# EAGLE board piezo-preamp-tickler_V2-RevB (EAGLE 8.2.1)
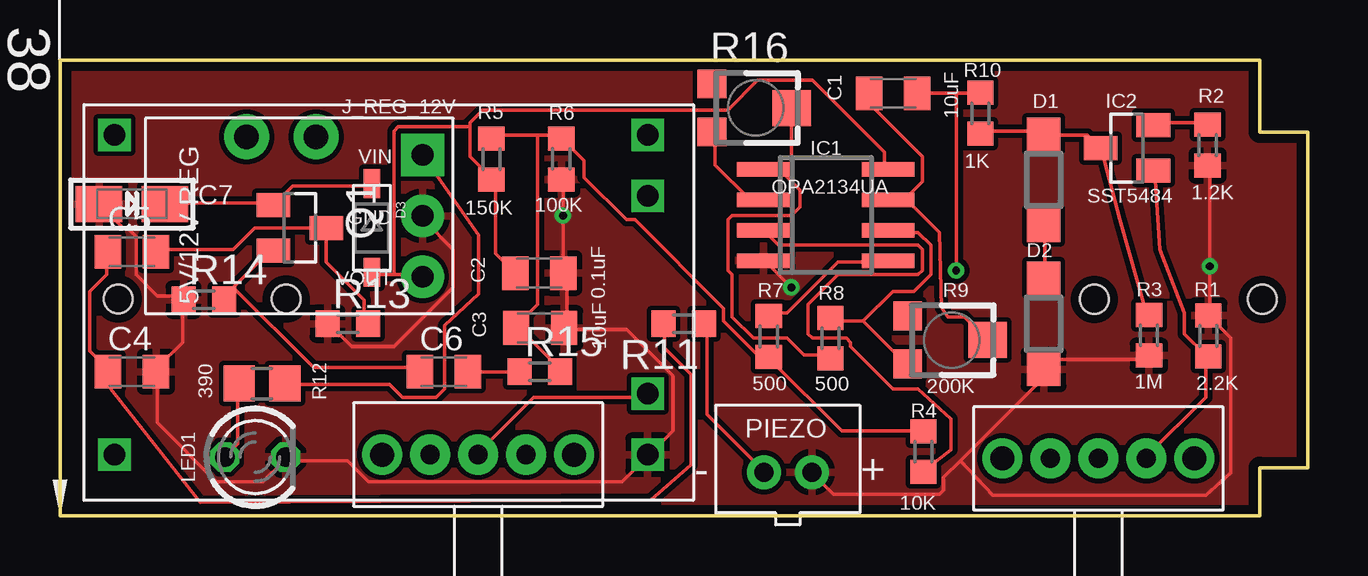
[diagram p0: board, top side]
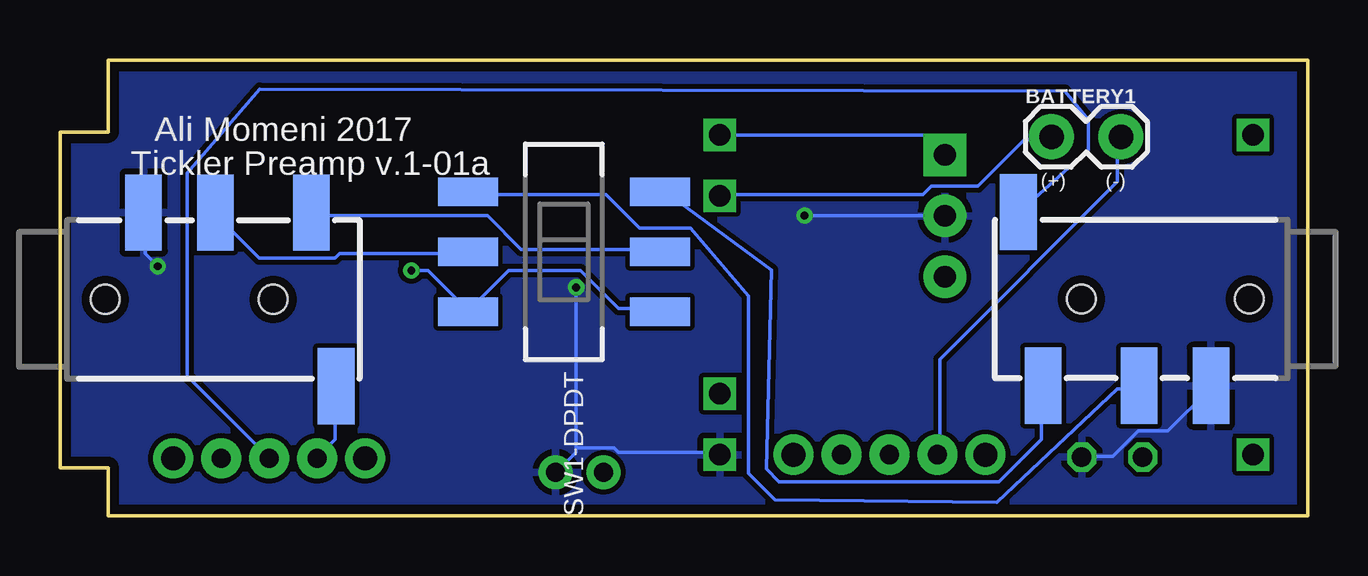
[diagram p1: board, bottom side, seen from below]

Size 52 x 19 mm. Coordinates in mm from the lower left corner, seen from the top.
Outline: 0,0 50,0 50,2 52,2 52,16 50,16 50,19 0,19 0,0
Copper layers (1*16): Top 0.0356mm / dielectric 1.5011mm / Bottom 0.0356mm
Design rules "oshpark-2layer": minimum track width 6mil, minimum drill 13mil, track to track 6mil, track to pad 6mil, pad to pad 6mil, via to via 6mil, smd to smd 6mil, copper to edge 15mil, drill to drill 6mil, minimum pad ring 7mil, minimum via ring 7mil, stop-mask expansion 2.5mil, vias tented up to drill 0mil, thermal gap 10mil
Net classes: 0 default: width 0.152 mm, clearance 0.2 mm

## Footprints (pad centres in the part's own frame; a part is rotated, then mirrored left to right if it is on the bottom)
1X02_LOCK = drill 1.016 pad 1.88: 1 -0.178,0; 2 2.718,0
C0805K = smd 1.1 x 1.4: 1 -1,0; 2 1,0
EIA3216-18/A-R = smd 1.95 x 1.5: + 1.375,0; - -1.375,0
SOD123 = smd 1.4 x 1.4: A 1.9,0; C -1.9,0
SOD-123 = smd 1.2 x 0.7: A 1.85,0; C -1.85,0
SO08 = smd 0.6 x 2.2: 1 -1.905,-2.6; 2 -0.635,-2.6; 3 0.635,-2.6; 4 1.905,-2.6; 5 1.905,2.6; 6 0.635,2.6; 7 -0.635,2.6; 8 -1.905,2.6
SOT23 = smd 1 x 1.4: 1 -0.95,-1.1; 2 0.95,-1.1; 3 0,1.1
POLOLU_5V-12V_STEPUP_U3V12F5-U3V12F12 = drill 0.9 pad 1.778: GND 0,-6.35; VOUT -2.54,-6.35 | drill 0.9 pad 1.778 square: VIN 2.54,-6.35
LED3MM = drill 0.813 octagon: A -1.27,0; K 1.27,0
JST-PH-2-THM = drill 0.8 pad 1.422: 1 1,0; 2 -1,0
SWITCH_SPDT-TE-CONNECT = drill 0.8 pad 1.676: 1 2,0; 2 4,0; 3 6,0 | drill 1 pad 1.676: MOUNT1 0,0; MOUNT2 8,0
R0603 = smd 1 x 1.1: 1 -0.85,0; 2 0.85,0
TC33X = smd 1.2 x 1.2: 1 -1,-1.825; 3 1,-1.825 | smd 1.5 x 1.6: 2 0,1.5
R0805 = smd 1.3 x 1.5: 1 -0.95,0; 2 0.95,0
DPDT_SMT_JS202011SCQN = smd 1.2 x 2.5: P$1 -2.5,-4; P$2 0,-4; P$3 2.5,-4; P$4 2.5,4; P$5 0,4; P$6 -2.5,4
AUDIO-JACK-TRRS-SMD = smd 1.524 x 3.175: EARTH 11.227,-3.619; RING1 6.2,3.619; RING2 3.2,3.619; TIP 10.2,3.619 | hole 1.2: 1.6,0; 8.6,0
TP4056-LITHIUM-PROTECTED-MODULE = drill 0.9 square: B+ 10.795,4.445; B- 10.795,-3.81; IN+ -11.43,6.985; IN- -11.43,-6.35; OUT+ 10.795,6.985; OUT- 10.795,-6.35

## Placement (x,y rotation side)
BATTERY1  [1X02_LOCK]  10.49,15.79 0 bottom
C1  10uF  [C0805K]  34.73,17.61 0 top
C2  0.1uF  [C0805K]  19.98,10.11 0 top
C3  10uF  [C0805K]  20.01,7.83 0 top
C4  10p  [C0805K]  3,6 0 top
C5  0.033u  [C0805K]  3,11 0 top
C6  0.033u  [C0805K]  16,6 0 top
C7  3.3U  [EIA3216-18/A-R]  3,13 0 top
D1  [SOD123]  41,14 270 top
D2  [SOD123]  41,8 90 top
D3  1N4148  [SOD-123]  13,12 270 top
IC1  OPA2134UA  [SO08]  31.92,12.54 270 top
IC2  SST5484  [SOT23]  44.47,15.33 90 top
J_REG_12V  POLOLU_VOLTAGE_REGULATORS_3PIN  [POLOLU_5V-12V_STEPUP_U3V12F5-U3V12F12]  8.77,12.5 90 top
LED1  [LED3MM]  8.14,2.44 0 top
PIEZO  [JST-PH-2-THM]  30.34,1.81 0 top
POWER  SPDT  [SWITCH_SPDT-TE-CONNECT]  13.43,2.54 0 top
Q1  SST201  [SOT23]  10,12 270 top
R1  2.2K  [R0603]  47.86,7.49 270 top
R2  1.2K  [R0603]  47.83,15.45 90 top
R3  1M  [R0603]  45.39,7.52 90 top
R4  10K  [R0603]  35.99,2.67 90 top
R5  150K  [R0603]  17.98,14.86 270 top
R6  100K  [R0603]  20.9,14.87 90 top
R7  500  [R0603]  29.54,7.46 270 top
R8  500  [R0603]  32.12,7.39 90 top
R9  200K  [TC33X]  37.16,7.32 270 top
R10  1K  [R0603]  38.37,16.78 90 top
R11  100K  [R0603]  26,8 180 top
R12  390  [R0805]  8.42,5.5 0 top
R13  10M  [R0603]  12,8 0 top
R14  220K  [R0603]  6,9 0 top
R15  13K  [R0603]  20,6 0 top
R16  200K  [TC33X]  29,17 270 top
SW1-DPDT  OUTPUT-select  [DPDT_SMT_JS202011SCQN]  31,11 270 bottom
SW2-SPST  INPUT-select  [SWITCH_SPDT-TE-CONNECT]  39.28,2.38 0 top
TO-HEADSET  AUDIO-JACK3LGPADS  [AUDIO-JACK-TRRS-SMD]  51.72,9.02 0 bottom
TO-PHONE  AUDIO-JACK3LGPADS  [AUDIO-JACK-TRRS-SMD]  0.82,9.03 180 bottom
USB-LIPO-CHARGER  TP4056-MODULE  [TP4056-LITHIUM-PROTECTED-MODULE]  13.7,8.89 0 top

## Library data of the parts
BATTERY1 = SparkFun-Connectors; NEG: (-); POS: (+)
C1-C6 PIEZO R9 R16 = adafruit
C7 = microbuilder; DIGIKEY: 399-8282-1-ND
D1 D2 = diode
D3 = adafruit; DIGIKEY: 1N4148WTPMSCT-ND
IC1 = linear
IC2 Q1 = transistor-fet
J_REG_12V R1-R8 R10-R15 USB-LIPO-CHARGER = CMU-ArtFab
LED1 = led
POWER = CMU-ArtFab; POWER: power
SW1-DPDT = microbuilder; BOTTOM: buffer2-phone; DIGIKEY: 401-2002-1-ND; DIGIKEY2: 563-1342-1-ND; TOP: opamp
SW2-SPST = CMU-ArtFab; INPUT: input
TO-HEADSET = Daniel; HEADSET: HEADSET
TO-PHONE = Daniel; PHONE: phone

## Nets
+12V: C2.1 D3.A IC1.8 J_REG_12V.VOUT R5.2
GND: C2.2 C3.2 C4.2 C7.- D2.C IC1.4 J_REG_12V.GND LED1.K PIEZO.1 R1.1 R2.1 R3.1 R6.1 R13.1 R14.1 TO-HEADSET.RING2 TO-PHONE.RING2 USB-LIPO-CHARGER.OUT-
IN+: USB-LIPO-CHARGER.IN+
IN-: USB-LIPO-CHARGER.IN-
N$1: D1.A D2.A
N$2: PIEZO.2 R11.1
N$3: IC2.2 R2.2
N$5: IC1.5 R7.1
N$6: C1.1 IC1.7 R9.2
N$7: IC1.6 R8.2 R9.3
N$8: C3.1 R4.2 R5.1 R6.2 R7.2 R15.2
N$9: IC1.3 R4.1
N$10: D1.C IC2.3 R3.2 R10.1
N$11: C1.2 R10.2 SW1-DPDT.P$3 SW1-DPDT.P$4
N$12: SW2-SPST.1 TO-HEADSET.EARTH
N$13: SW1-DPDT.P$5 TO-HEADSET.TIP
N$14: IC1.1 R8.1 R16.2
N$15: SW1-DPDT.P$2 TO-HEADSET.RING1
N$16: C4.1 C5.1 R11.2
N$17: SW2-SPST.2 TO-PHONE.EARTH
N$18: LED1.A R12.1
N$19: BATTERY1.1 USB-LIPO-CHARGER.B+
N$20: POWER.2 USB-LIPO-CHARGER.B-
N$21: BATTERY1.2 POWER.1
N$22: C5.2 Q1.3 R13.2
N$23: C6.1 Q1.2 R14.2
N$24: C6.2 R15.1
N$25: C7.+ D3.C Q1.1
N$26: SW1-DPDT.P$1 TO-PHONE.RING1
N$27: SW1-DPDT.P$6 TO-PHONE.TIP
N$28: IC1.2 R16.3
SELECT: IC2.1 R1.2 SW2-SPST.3
VBAT: J_REG_12V.VIN R12.2 USB-LIPO-CHARGER.OUT+

## Tracks (layer width: path | path; a pad name or v marks a point on that pad's centre or on a via)
+12V
  Top 0.152: 13.92,10.04 14.98,10.04 J_REG_12V.VOUT | 13.92,10.04 13.04,10.04 D3.A | C2.1 18.85,10.22 18.15,10.92 18.15,13.92 R5.2 17.97,14.1 17.09,14.98 17.09,16.21 | 17.09,16.21 17.09,16.39 17.62,16.91 27.84,16.91 29.07,18.15 31.36,18.15 34.36,15.15 34.36,14.45 IC1.8 | 13.92,10.04 13.92,16.03 14.1,16.21 17.09,16.21
GND  (via drill 0.33)
  Top 0.152: C7.- 1.76,12.86 2.64,11.98 2.82,11.98 3.17,11.63 3.17,10.04 4.05,9.16 5.11,9.16 R14.1 5.11,8.99 5.11,7.22 4.05,6.17 C4.2 4.05,5.99 4.05,3.88 6.52,1.41 8.46,1.41 9.34,2.29 LED1.K 9.52,2.29 11.98,2.29 12.86,1.41 23.43,1.41 24.49,2.47 USB-LIPO-CHARGER.OUT- 24.67,2.64 25.55,3.52 25.55,5.82 23.61,7.75 21.14,7.75 C3.2 21.14,7.93 21.14,10.04 C2.2 20.97,10.22 v20.97,12.51 20.97,13.92 R6.1 | R13.1 11.28,7.93 12.16,7.05 13.92,7.05 16.39,9.52 16.39,11.1 15.15,12.33 J_REG_12V.GND | R2.1 47.93,14.45 v47.93,10.4 47.93,8.46 R1.1 47.93,8.28 48.81,7.4 48.81,1.79 47.75,0.83 38.89,0.83 37.53,2.29 | R3.1 45.28,6.52 41.41,6.52 41.05,6.17 D2.C 40.88,5.99 40.88,5.64 37.53,2.29 | v30.48,9.52 29.43,10.57 IC1.4 | 37.53,2.29 36.83,1.59 36.83,1.06 36.65,0.88 32.24,0.88 31.36,1.76 PIEZO.1
  Bottom 0.152: LED1.K 9.34,2.47 8.11,2.47 7.05,3.52 5.82,3.52 4.05,5.29 TO-PHONE.RING2 | v47.93,10.4 48.45,10.92 48.45,12.51 TO-HEADSET.RING2 | 30.48,2.82 30.48,2.64 31.19,1.94 PIEZO.1 | 30.48,2.82 v30.48,9.52 | 30.48,2.82 28.9,2.82 28.72,2.64 24.67,2.64 USB-LIPO-CHARGER.OUT- | v20.97,12.51 15.15,12.51 J_REG_12V.GND
  pour Top: -1,20.03 53,20.03 53,-0.97 -1,-0.97
  pour Bottom: -1,20.03 53,20.03 53,-0.97 -1,-0.97
N$1
  Top 0.152: D2.A 41.05,10.04 41.05,11.98 D1.A
N$2
  Top 0.152: R11.1 26.96,7.93 26.96,4.23 29.25,1.94 PIEZO.2
N$3
  Top 0.152: R2.2 47.75,16.39 45.64,16.39 IC2.2
N$5
  Top 0.152: R7.1 29.6,8.46 30.31,8.46 32.42,10.57 34.36,10.57 IC1.5
N$6
  Top 0.152: R9.2 38.59,7.4 37.71,8.28 37.02,8.28 36.75,8.68 36.65,11.8 35.24,13.21 | 35.24,13.21 35.95,13.92 35.95,14.98 33.83,17.09 33.83,17.44 C1.1 | 35.24,13.21 34.53,13.21 IC1.7 35.24,13.21
N$7
  Top 0.152: 33.48,8.11 32.24,8.11 R8.2 | 33.48,8.11 35.24,6.34 R9.3 | 33.48,8.11 34.71,9.34 35.59,9.34 36.3,10.04 36.3,11.28 35.77,11.8 34.53,11.8 IC1.6
N$8
  Top 0.152: R4.2 35.95,3.52 32.6,3.52 29.6,6.52 R7.2 29.43,6.7 29.07,6.7 27.66,8.11 27.66,8.63 23.96,12.33 23.61,12.33 21.85,14.1 21.85,14.8 20.97,15.68 R6.2 20.79,15.86 19.91,15.86 | 19.91,15.86 18.15,15.86 R5.1 | 19.03,7.93 20.79,6.17 R15.2 | 19.91,15.86 19.91,8.81 19.03,7.93 | 19.03,7.93 C3.1
N$9
  Top 0.152: R4.1 36.12,1.94 37.13,2.74 37.13,4.03 35.77,5.29 34.71,5.29 32.95,7.05 32.95,7.22 32.77,7.4 31.36,7.4 31.19,7.58 31.19,8.81 32.42,10.04 35.77,10.04 35.95,10.22 35.95,11.1 35.77,11.28 29.95,11.28 29.43,11.8 IC1.3
N$10
  Top 0.152: R10.1 38.41,16.03 40.88,16.03 D1.C 41.05,15.86 42.82,15.86 43.34,15.33 IC2.3 43.52,15.15 43.52,14.8 44.18,12.34 45.28,8.46 R3.2
N$11  (via drill 0.33)
  Top 0.152: 37.35,17.62 35.77,17.62 C1.2 | 37.35,17.62 38.23,17.62 R10.2 | v37.35,10.22 37.35,17.62
  Bottom 0.152: v37.35,10.22 36.65,10.22 35.06,8.63 SW1-DPDT.P$3 34.89,8.63 33.3,10.22 30.31,10.22 28.72,8.63 27.14,8.63 SW1-DPDT.P$4
N$12
  Bottom 0.152: TO-HEADSET.EARTH 40.53,5.29 40.53,3.17 41.23,2.47 SW2-SPST.1
N$13
  Bottom 0.152: SW1-DPDT.P$5 27.14,11.1 32.77,11.1 34.18,12.51 41.41,12.51 TO-HEADSET.TIP
N$14
  Top 0.152: 30.13,14.27 30.84,13.57 30.84,12.86 30.48,12.51 28.02,12.51 27.84,12.33 27.84,10.22 28.02,10.04 28.02,8.28 28.9,7.4 30.31,7.4 31.01,6.7 32.07,6.7 R8.1 | 30.13,14.27 29.43,14.27 IC1.1 30.13,14.27 | 30.13,14.27 30.48,14.62 30.48,16.91 R16.2
N$15
  Bottom 0.152: SW1-DPDT.P$2 35.06,10.92 40.35,10.92 40.53,10.75 43.7,10.75 45.46,12.51 TO-HEADSET.RING1
N$16
  Top 0.152: R11.2 25.2,7.93 25.2,7 26.3,5.89 26.3,2.11 24.64,0.66 5.84,0.56 2.11,5.29 2.11,5.99 C4.1 1.94,6.17 1.23,6.87 1.23,9.34 1.94,10.04 1.94,10.92 C5.1
N$17
  Bottom 0.152: TO-PHONE.EARTH 11.98,12.69 9.14,15.23 9.14,16.51 10.12,17.69 43.67,17.79 46.69,14.27 46.69,5.82 43.34,2.47 SW2-SPST.2
N$18
  Top 0.152: R12.1 7.4,5.46 7.4,3 6.87,2.47 LED1.A
N$19
  Bottom 0.152: USB-LIPO-CHARGER.B+ 24.49,13.39 16.03,13.39 15.68,13.74 13.74,13.74 11.8,15.68 10.75,15.68 BATTERY1.1
N$20
  Top 0.152: USB-LIPO-CHARGER.B- 24.49,4.93 19.73,4.93 17.44,2.64 POWER.2
N$21
  Bottom 0.152: POWER.1 15.33,2.64 15.33,6.52 7.93,13.92 7.93,15.68 BATTERY1.2
N$22
  Top 0.152: R13.2 12.69,8.11 12.69,8.99 11.1,10.57 11.1,11.98 Q1.3 10.92,11.98 8.11,11.98 7.22,11.1 4.05,11.1 C5.2
N$23
  Top 0.152: 7.22,9.52 8.81,11.1 Q1.2 | 7.22,9.52 6.87,9.16 R14.2 7.22,9.52 | 7.22,9.52 10.57,6.17 14.98,6.17 C6.1
N$24
  Top 0.152: R15.1 19.03,5.99 17.09,5.99 C6.2
N$25
  Top 0.152: D3.C 12.86,13.74 9.69,13.74 8.99,13.04 Q1.1 8.81,13.04 4.41,13.04 C7.+
N$26
  Bottom 0.152: SW1-DPDT.P$1 34.89,13.39 29.25,13.39 27.84,11.98 25.73,11.98 23.31,9.16 23.31,1.76 22.2,0.66 12.96,0.56 7.93,5.29 7.05,5.29 TO-PHONE.RING1
N$27
  Bottom 0.152: SW1-DPDT.P$6 26.96,13.39 26.61,13.39 22.35,10.24 22.55,1.94 22.02,1.41 12.86,1.41 11.1,3.17 11.1,5.29 TO-PHONE.TIP
N$28
  Top 0.152: R16.3 27.31,15.86 27.31,14.62 28.72,13.21 29.25,13.21 IC1.2
SELECT
  Top 0.152: SW2-SPST.3 45.28,2.47 47.75,4.93 47.75,6.52 R1.2 47.75,6.7 46.87,7.58 46.87,8.46 45.84,11.09 45.64,14.27 IC2.1
VBAT
  Top 0.152: R12.2 9.52,5.46 13.74,5.46 14.27,4.93 15.68,4.93 16.03,5.29 16.03,7.93 17.44,9.24 17.44,11.69 15.15,14.98 J_REG_12V.VIN
  Bottom 0.152: USB-LIPO-CHARGER.OUT+ 24.49,15.86 15.86,15.86 15.15,15.15 J_REG_12V.VIN

## Text on the board
bNames: Ali Momeni 2017 | Tickler Preamp v.1-01a